# Altium PCB DAQ_v1.PcbDoc (part 2 of 2)
Units mil, origin at the board's own origin, x right, y up, seen from the top; angles counter-clockwise.
Board outline 4750 x 5000 mil, 4 copper layers (Component Side, Ground, Power, Solder Side), stack 61.2 mil thick; 174 components, 158 nets, 771 pads, 270 vias.
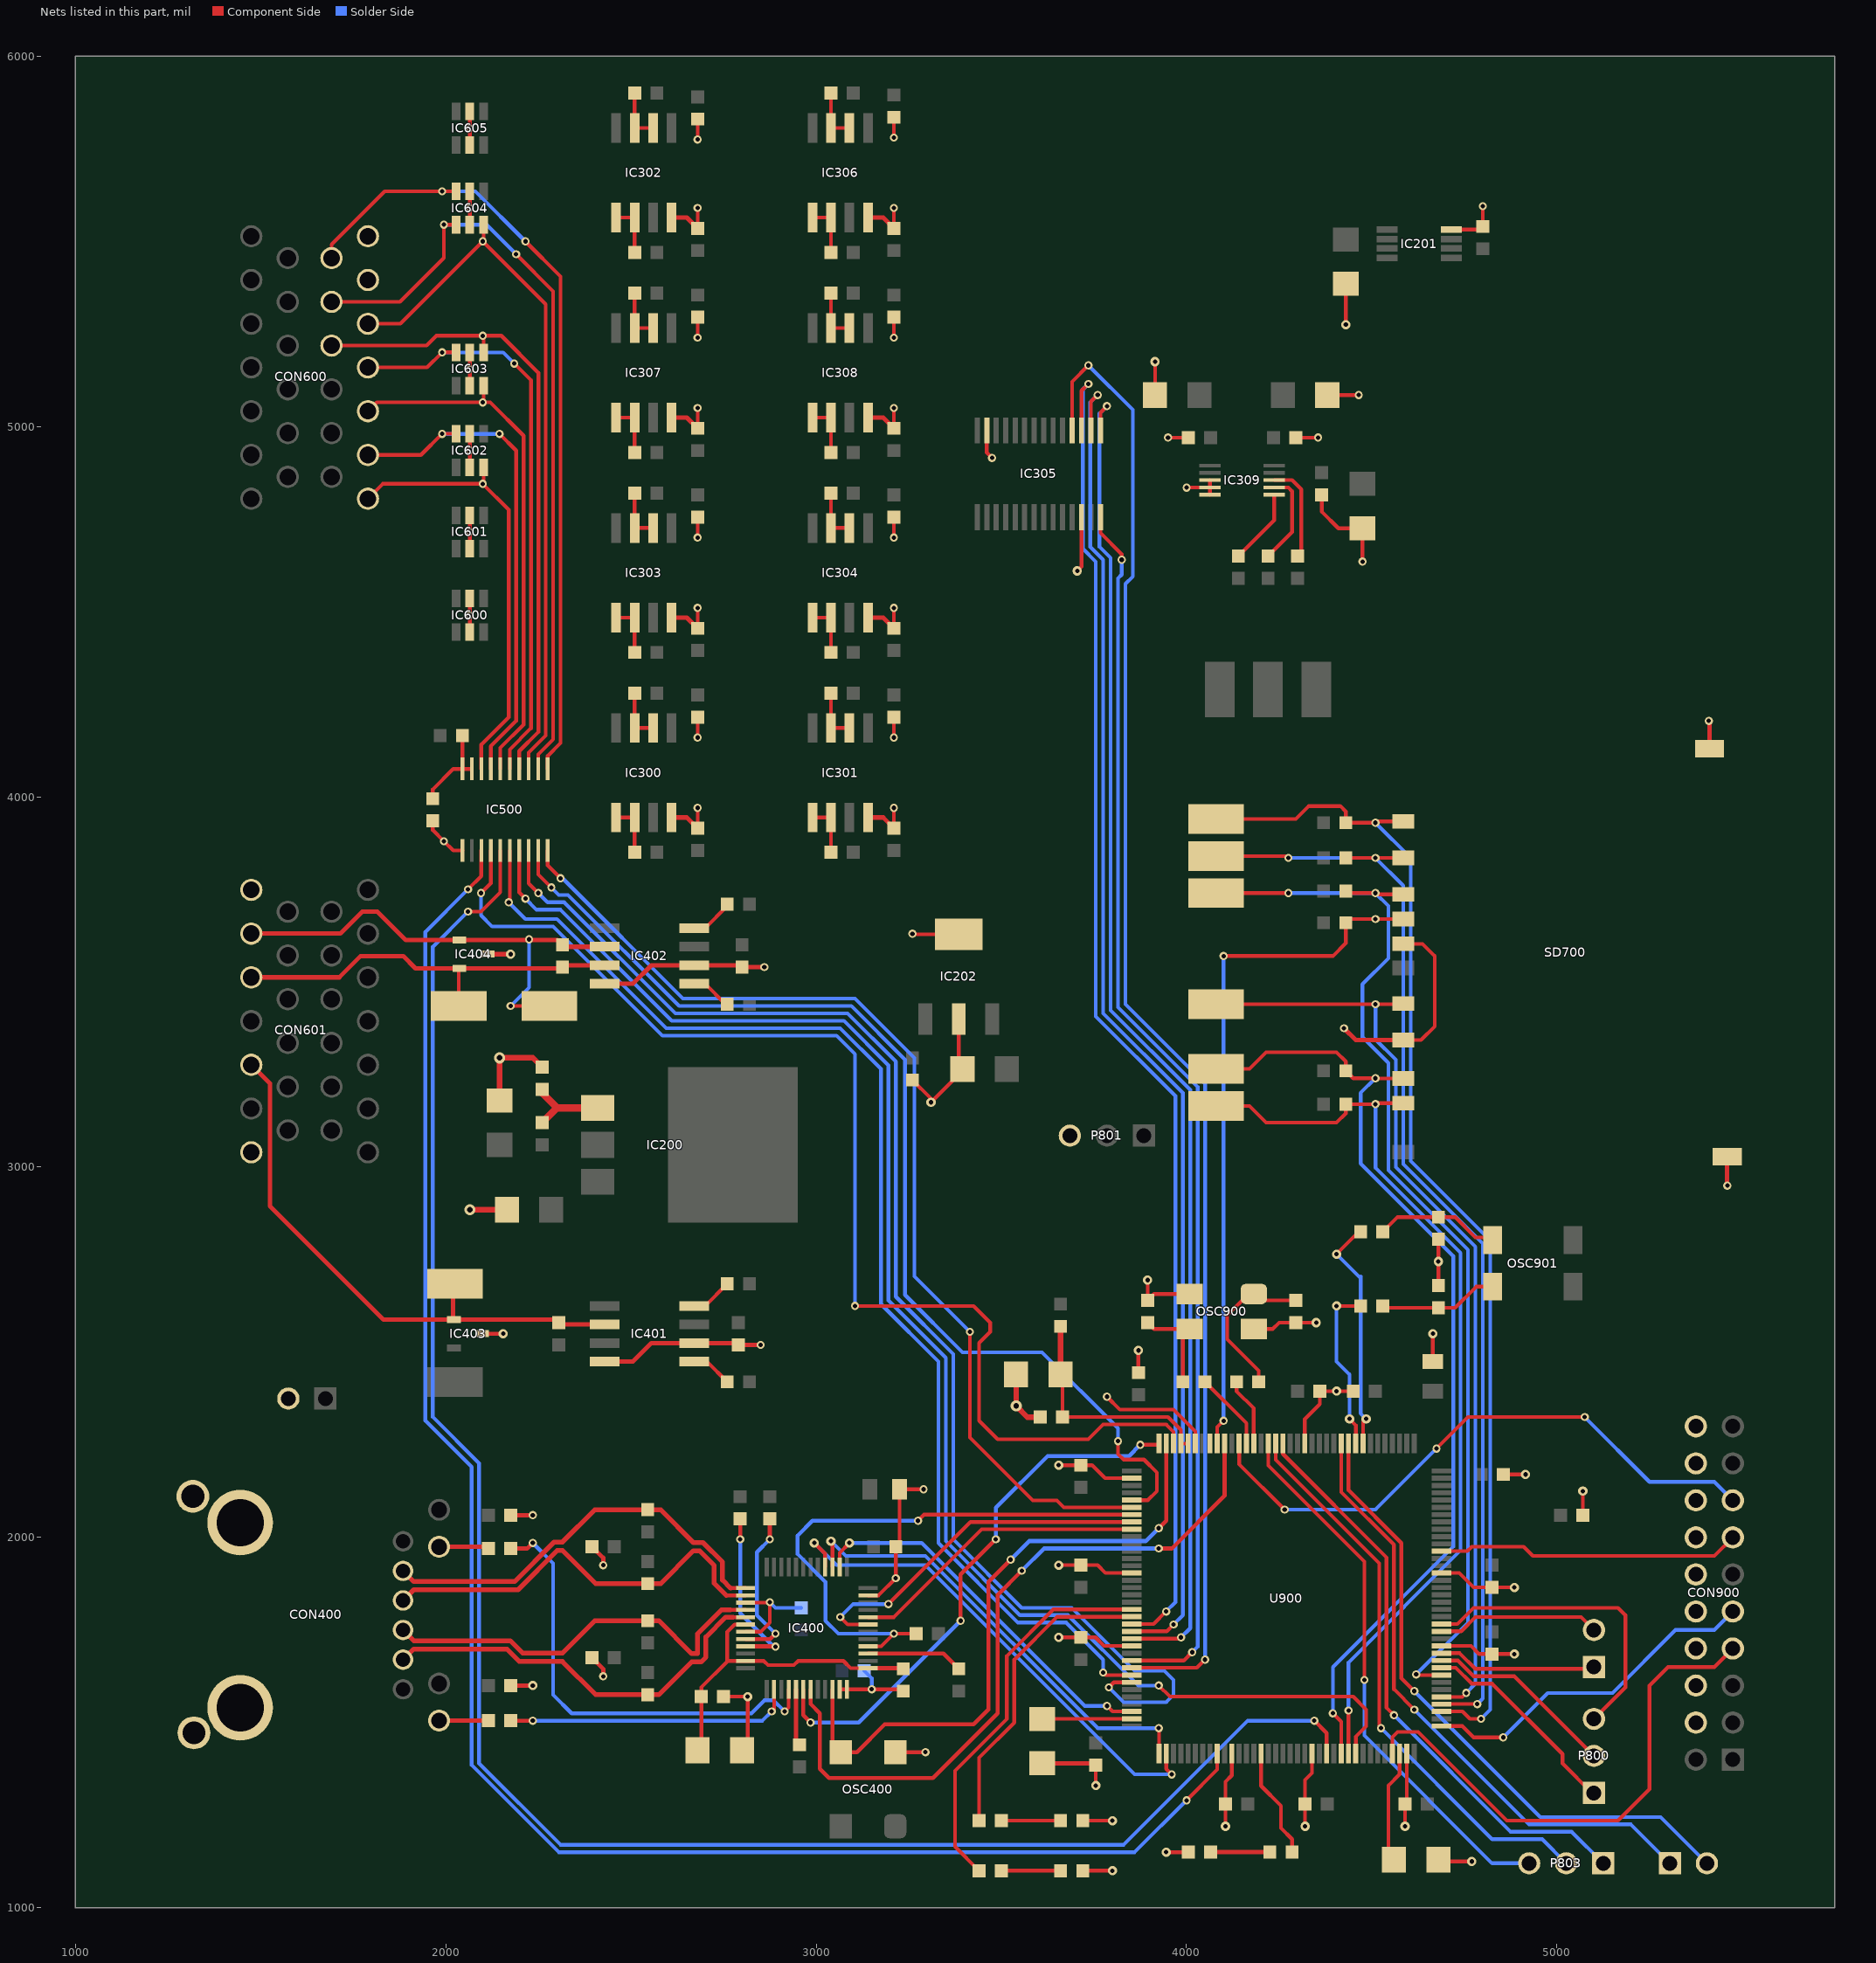
[diagram p4: the nets of this part, all layers, seen from the top]

## Via types
v1: diameter 22, hole 12, Component Side to Solder Side, 196 vias
v2: diameter 25, hole 12, Component Side to Solder Side, 50 vias
v3: diameter 30, hole 15, Component Side to Solder Side, 9 vias
v4: diameter 160, hole 134, Component Side to Solder Side, 4 vias
v5: diameter 40, hole 20, Component Side to Solder Side, 4 vias
v6: diameter 250, hole 145, Component Side to Solder Side, 3 vias
v7: diameter 68.9, hole 59.06, Component Side to Solder Side, 2 vias
v8: diameter 25, hole 15, Component Side to Solder Side, 1 vias
v9: diameter 50, hole 30, Component Side to Solder Side, 1 vias

## Nets (pads, with @x,y where several pads share a name; then routed paths per layer and width w, separated by ;. In a path a pad name is that pad's centre, name@x,y a point inside that pad or via, vN(x,y) a via of type N, cw(c..) or ccw(c..) an arc to the next point about the centre after c; other vN are vias at no path point) (continued)
CANH1: CON601.5 IC402.7 IC404.2 R414.1 TP810.1 | length 1097.5
  Component Side w10: TP810.1@2035,3435 2035,3534.99 IC404.2@2036.81,3536.81
  Component Side w12: CON601.5@1475,3512.44 1712.44,3512.44 1770,3570 1885,3570 1918.19,3536.81 IC404.2@2036.81,3536.81 2311.81,3536.81 R414.1@2315,3540 2320,3545 IC402.7@2429,3545
CANL0: CON601.3 IC401.6 IC403.1 R413.2 TP811.1 | length 1519.5
  Component Side w12: CON601.3@1475,3276.22 1525,3226.22 1525,2895 1831.81,2588.19 IC403.1@2021.81,2588.19 ; TP811.1@2020,2685 2020,2590 IC403.1@2021.81,2588.19 ; R413.2@2291.81,2588.19 IC403.1@2021.81,2588.19 ; R413.2@2305,2580 2310,2575 IC401.6@2429,2575
CANL1: CON601.6 IC402.6 IC404.1 R414.2 TP809.1 | length 1323.7
  Component Side w10: v1(2175,3435) TP809.1@2280,3435
  Component Side w12: CON601.6@1475,3630.55 1715.55,3630.55 1775,3690 1815,3690 1891.81,3613.19 IC404.1@2036.81,3613.19 2301.81,3613.19 R414.2@2315,3600 2320,3595 IC402.6@2429,3595
  Solder Side w10: v1(2175,3435) 2225,3485 v1(2225,3615)
CRS_DV: IC400.40 R403.1 U900.43 | length 1529.4
  Component Side w10: IC400.40@3140.35,1705.79 3175.79,1705.79 v1(3210,1740) R403.1@3270,1740 ; v1(3275,2045) 3291.38,2061.38 U900.43@3851.69,2061.38
  Solder Side w10: v1(3210,1740) 3060,1740 3025,1775 3025,1880 2950,1955 2950,2005 2990,2045 v1(3275,2045)
D0: IC500.7 U900.100 | length 4105.6
  Component Side w10: IC500.7@2198.39,3854.76 2198.39,3741.61 v1(2215,3725) ; v1(3925,1600) 3955,1570 4450,1570 4485,1535 4485,1490 4457.01,1462.01 U900.100@4457.01,1416.69
  Solder Side w10: v1(2215,3725) 2245,3695 2310,3695 2610,3395 3075,3395 3195,3275 3195,2640 3350,2485 3350,1990 3550,1790 3680,1790 3870,1600 v1(3925,1600)
D1: IC500.9 U900.41 | length 2945.2
  Component Side w10: IC500.9@2249.57,3854.76 2249.57,3790.43 v1(2285,3755) ; v1(3815,2260) 3815,2225 3830,2210 3885,2210 3920,2175 3920,2125 3895.75,2100.75 U900.41@3851.69,2100.75
  Solder Side w10: v1(2285,3755) 2305,3735 2330,3735 2630,3435 3095,3435 3240,3290 3240,2655 3395,2500 3610,2500 3815,2295 v1(3815,2260)
D2: IC500.10 U900.42 | length 2847.2
  Component Side w10: IC500.10@2275.16,3854.76 2275.16,3814.84 v1(2310,3780) ; v1(3415,2555) 3415,2270 3585,2100 3650,2100 3668.94,2081.06 U900.42@3851.69,2081.06
  Solder Side w10: v1(2310,3780) 2315,3780 2640,3455 3105,3455 3265,3295 3265,2705 v1(3415,2555)
D3: IC500.3 U900.81 | length 4830.5
  Component Side w10: v1(2060,3750) 2096.02,3786.02 IC500.3@2096.02,3854.76 ; v1(4000,1290) 4082.99,1372.99 U900.81@4082.99,1416.69
  Solder Side w10: v1(2060,3750) 1945,3635 1945,2315 2070,2190 2070,1385 2305,1150 3860,1150 v1(4000,1290)
D4: IC500.4 U900.34 | length 3294.4
  Component Side w10: v1(2095,3740) 2121.61,3766.61 IC500.4@2121.61,3854.76 ; v1(3105,2625) 3425,2625 3470,2580 3470,2555 3440,2525 3440,2315 3490,2265 3735,2265 3775,2305 3945,2305 3964.88,2285.12 U900.34@3964.88,2253.31
  Solder Side w10: v1(2095,3740) 2095,3680 2125,3650 2290,3650 2585,3355 3055,3355 3105,3305 v1(3105,2625)
D5: IC500.5 U900.96 | length 5199.5
  Component Side w10: v1(2060,3690) 2095,3690 2147.2,3742.2 IC500.5@2147.2,3854.76 ; v1(4345,1505) 4378.27,1471.73 U900.96@4378.27,1416.69
  Solder Side w10: v1(2060,3690) 1965,3595 1965,2325 2090,2200 2090,1390 2310,1170 3830,1170 4165,1505 v1(4345,1505)
D6: IC500.6 U900.65 | length 3366.5
  Component Side w10: v1(2170,3715) 2172.8,3717.8 IC500.6@2172.8,3854.76 ; v1(3775,1635) 3781.69,1628.31 U900.65@3851.69,1628.31
  Solder Side w10: v1(2170,3715) 2215,3670 2300,3670 2595,3375 3065,3375 3175,3265 3175,2630 3330,2475 3330,1985 3545,1770 3675,1770 3775,1670 v1(3775,1635)
D7: IC500.8 U900.66 | length 3692.8
  Component Side w10: IC500.8@2223.98,3854.76 2223.98,3766.02 v1(2250,3740) ; v1(3790,1595) 3803.62,1608.62 U900.66@3851.69,1608.62
  Solder Side w10: v1(2250,3740) 2275,3715 2320,3715 2620,3415 3085,3415 3215,3285 3215,2650 3370,2495 3370,1995 3555,1810 3690,1810 3860,1640 3940,1640 3965,1615 3965,1575 3945,1555 3830,1555 v1(3790,1595)
DAT0: R703.1 SD700.7 TP802.1 U900.98 | length 2684.9
  Component Side w10: TP802.1@4050,3265 4170,3265 4215,3310 4405,3310 4430,3285 R703.1@4430,3260 4450,3240 v1(4510,3240) 4510.51,3239.49 SD700.7@4585,3239.49 ; v1(4395,1525) 4417.64,1502.36 U900.98@4417.64,1416.69
  Solder Side w10: v1(4395,1525) 4395,1650 4720,1975 4720,2760 4470,3010 4470,3200 v1(4510,3240)
DAT1: R702.2 SD700.8 TP803.1 U900.99 | length 2564
  Component Side w10: TP803.1@4050,3165 4170,3165 4215,3120 4405,3120 4430,3145 R702.2@4430,3170 v1(4510,3170) 4512.56,3172.56 SD700.8@4585,3172.56 ; U900.99@4437.32,1416.69 v1(4437.32,1532.32)
  Solder Side w10: v1(4437.32,1532.32) 4437.32,1662.32 4740,1965 4740,2768.28 4510,2998.28 v1(4510,3170)
DAT2: R701.2 SD700.9 TP804.1 U900.111 | length 3260.9
  Component Side w10: TP804.1@4050,3940 4295,3940 4330,3975 4415,3975 4430,3960 R701.2@4430,3930 v1(4510,3930) 4513.58,3933.58 SD700.9@4585,3933.58 ; U900.111@4688.31,1529.88 4745.12,1529.88 4765,1510 v1(4795,1510)
  Solder Side w10: v1(4510,3930) 4605,3835 4605,3016.42 4820,2801.42 4820,1535 v1(4795,1510)
DAT3: R705.1 SD700.1 TP805.1 U900.112 | length 3125.3
  Component Side w10: TP805.1@4050,3840 4270,3840 v1(4275,3835) ; R705.1@4430,3835 v1(4510,3835) 4510.16,3835.16 SD700.1@4585,3835.16 ; U900.112@4688.31,1549.57 4688.74,1550 v1(4785,1550)
  Solder Side w10: v1(4275,3835) v1(4510,3835) 4585,3760 4585,3008.14 4800,2793.14 4800,1565 v1(4785,1550)
DIN0: CON600.17 IC500.14 IC603.6 | length 1747.8
  Component Side w10: CON600.17@1691.54,5218.39 1948.39,5218.39 1975,5245 v1(2100,5245) ; IC603.6@2102.4,5200.28 2102.4,5242.6 v1(2100,5245) ; IC500.14@2198.39,4075.24 2198.39,4123.39 2250,4175 2250,5145 2150,5245 v1(2100,5245)
DIN1: CON600.18 IC500.12 IC604.1 | length 2150.9
  Component Side w10: CON600.18@1691.54,5336.5 1876.5,5336.5 1995,5455 v1(1995,5545) IC604.1@2027.32,5545 ; v1(2190,5465) 2290,5365 2290,4155 2249.57,4114.57 IC500.12@2249.57,4075.24
  Solder Side w10: v1(1995,5545) 2110,5545 v1(2190,5465)
DIN2: CON600.19 IC500.11 IC604.4 | length 2192
  Component Side w10: CON600.19@1691.54,5454.61 1691.54,5491.54 1835,5635 v1(1990,5635) 1990.28,5635.28 IC604.4@2027.6,5635.28 ; v1(2215,5500) 2310,5405 2310,4145 2275.16,4110.16 IC500.11@2275.16,4075.24
  Solder Side w10: v1(1990,5635) 2080,5635 v1(2215,5500)
DIN3: CON600.20 IC500.18 IC602.3 | length 1201.7
  Component Side w10: CON600.20@1789.96,4805 1829.96,4845 v1(2100,4845) ; IC500.18@2096.02,4075.24 2096.02,4141.02 2170,4215 2170,4775 v1(2100,4845) ; IC602.3@2102.4,4889.72 2102.4,4847.4 v1(2100,4845)
DIN4: CON600.21 IC500.17 IC602.4 | length 1368
  Component Side w10: CON600.21@1789.96,4923.11 1933.11,4923.11 v1(1990,4980) 1990.28,4980.28 IC602.4@2027.6,4980.28 ; IC500.17@2121.61,4075.24 2121.61,4136.61 2190,4205 2190,4935 v1(2145,4980)
  Solder Side w10: v1(1990,4980) v1(2145,4980)
DIN5: CON600.22 IC500.16 IC603.3 | length 1438.7
  Component Side w10: CON600.22@1789.96,5041.22 1813.74,5065 v1(2100,5065) ; IC603.3@2102.4,5109.72 2102.4,5067.4 v1(2100,5065) ; IC500.16@2147.2,4075.24 2147.2,4132.2 2210,4195 2210,4975 2120,5065 v1(2100,5065)
DIN6: CON600.23 IC500.15 IC603.4 | length 1599.1
  Component Side w10: CON600.23@1789.96,5159.33 1949.33,5159.33 v1(1990,5200) 1990.28,5200.28 IC603.4@2027.6,5200.28 ; IC500.15@2172.8,4075.24 2172.8,4127.8 2230,4185 2230,5125 v1(2185,5170)
  Solder Side w10: v1(1990,5200) 2155,5200 v1(2185,5170)
DIN7: CON600.24 IC500.13 IC604.3 | length 1962.2
  Component Side w10: CON600.24@1789.96,5277.44 1877.44,5277.44 v1(2100,5500) ; IC604.3@2102.4,5544.72 2102.4,5502.4 v1(2100,5500) ; IC500.13@2223.98,4075.24 2223.98,4118.98 2270,4165 2270,5330 v1(2100,5500)
GND: C200.2 C201.2 C202.2 C203.1 C204.1 C205.1 C300.2 C301.2 C302.2 C303.2 C304.2 C305.1 C306.1 C307.1 C308.1 C309.1 C310.2 C311.2 C312.2 C313.2 C314.2 C315.1 C316.1 C317.2 C318.1 C319.1 C320.1 C321.1 C401.1 C402.1 C403.2 C404.1 C405.1 C406.1 C407.1 C408.1 C409.2 C410.1 C411.1 C412.2 C413.2 C500.2 C900.1 C901.1 C902.1 C903.1 C906.2 C907.2 C908.2 C909.1 C910.1 C911.1 C912.1 C913.1 C914.1 C915.1 C916.1 C917.1 C918.1 C919.1 C920.1 C921.2 C922.1 C923.1 CON400.S CON600.25 CON600.26 CON601.1 CON601.7 CON900.4 CON900.6 CON900.8 CON900.10 CON900.12 CON900.14 CON900.16 CON900.18 CON900.20 IC201.4 IC202.2 IC300.4 IC301.4 IC302.4 IC303.4 IC304.4 IC305.12 IC305.27 IC306.4 IC307.4 IC308.4 IC309.3 IC309.4 IC309.5 IC400.15 IC400.19 IC400.35 IC400.36 IC400.47 IC401.2 IC401.8 IC402.2 IC402.8 IC403.3 IC404.3 IC500.1 IC600.2 IC600.5 IC601.2 IC601.5 IC602.2 IC602.5 IC603.2 IC603.5 IC604.2 IC604.5 IC605.2 IC605.5 LED_B.2 LED_G.2 LED_R.2 OSC400.2 OSC900.2 OSC900.4 P801.3 P802.2 R201.2 R904.1 SD700.3 SD700.6 SD700.GND U900.16 U900.31 U900.38 U900.51 U900.61 U900.83 U900.94 U900.107 U900.120 U900.130 | length 10969.2
  Component Side w10: C500.2@1965,3935 1965,3910 v1(1995,3880) 2020.24,3854.76 IC500.1@2044.84,3854.76 ; IC600.2@2065,4444.72 v1(2065,4490) IC600.5@2065,4535.28 ; IC601.2@2065,4669.72 v1(2065,4715) IC601.5@2065,4760.28 ; IC602.2@2065,4889.72 v1(2065,4935) IC602.5@2065,4980.28 ; IC603.2@2065,5109.72 v1(2065,5155) IC603.5@2065,5200.28 ; IC604.2@2065,5544.72 v1(2065,5590) IC604.5@2065,5635.28 ; IC605.2@2065,5759.72 v1(2065,5805) IC605.5@2065,5850.28 ; IC403.3@2098.19,2550 v2(2155,2550) ; C300.2@2680,3915 v1(2680,3970) ; v1(2680,4160) C305.1@2680,4215 ; C303.2@2680,4455 v1(2680,4510) ; v1(2680,4700) C308.1@2680,4755 ; C311.2@2680,4995 v1(2680,5050) ; v1(2680,5240) C320.1@2680,5295 ; C302.2@2680,5535 v1(2680,5590) ; v1(2680,5775) C307.1@2680,5830 ; C402.1@2750,1570 v2(2815,1570) 2815,1440 C403.2@2800,1425 ; C412.2@2785,2525 C412.2@2790,2520 ; C413.2@2795,3545 C413.2@2800,3540 ; IC400.19@2809.65,1745.16 2850.16,1745.16 2875,1770 2875,1822.8 2873.9,1823.9 IC400.15@2809.65,1823.9 ; IC400.35@3063.58,1589.65 IC400.36@3083.27,1589.65 3149.65,1589.65 v1(3150,1590) C401.1@3235,1590 ; IC400.47@3140.35,1843.58 3168.58,1843.58 v1(3215,1890) C404.1@3215,1975 3225,1985 C407.1@3225,2130 v1(3290,2130) ; C301.2@3210,3915 v1(3210,3970) ; v1(3210,4160) C306.1@3210,4215 ; C304.2@3210,4455 v1(3210,4510) ; v1(3210,4700) C309.1@3210,4755 ; C312.2@3210,4995 v1(3210,5050) ; v1(3210,5240) C321.1@3210,5295 ; C310.2@3210,5535 v1(3210,5590) ; v1(3210,5780) C319.1@3210,5835 ; OSC400.2@3213.5,1420 v1(3295,1420) ; C203.1@3260,3235 3310,3185 v2(3310,3175) 3395,3260 3385,3270 IC202.2@3385,3400 ; v1@3261.65,3628.35 IC202.2@3385,3628.35 ; IC305.27@3460.59,4988.86 3460.59,4929.41 v1(3475,4915) ; v2(3655,1730) C909.1@3715,1730 3754.09,1730 3777.05,1707.05 U900.61@3851.69,1707.05 ; v2(3655,1925) C910.1@3715,1925 3760,1925 3781.1,1903.9 U900.51@3851.69,1903.9 ; v2(3655,2195) C911.1@3715,2195 3745,2195 3780.2,2159.8 U900.38@3851.69,2159.8 ; v2(3705,4610) 3716.5,4621.5 IC305.12@3716.5,4755 ; LED_R.2@3720,1100 v2(3800,1100) ; LED_G.2@3720,1235 v2(3800,1235) ; v2(3755,1330) C908.2@3755,1385 ; v1(3785,2380) 3820,2345 3965,2345 4023.94,2286.06 U900.31@4023.94,2253.31 ; C912.1@3870,2445 v2(3870,2505) ; v2(3895,2695) C901.1@3895,2640 3912.24,2657.24 OSC900.2@4008.39,2657.24 ; C313.2@3915,5085 v2(3915,5175) ; v2(3945,1150) LED_B.2@4005,1150 ; v1(3950,4970) C315.1@4005,4970 ; v1(4000,4835) 4000.32,4835.31 IC309.4@4063.39,4835.31 ; IC309.5@4063.39,4815.63 IC309.4@4063.39,4835.31 ; IC309.3@4063.39,4855 IC309.4@4063.39,4835.31 ; v2(4105,1220) C920.1@4105,1280 4105,1340 4122.36,1357.36 U900.83@4122.36,1416.69 ; OSC900.4@4181.61,2562.76 4232.76,2562.76 4250,2580 C900.1@4295,2580 v2(4350,2580) ; C316.1@4295,4970 v1(4355,4970) ; U900.16@4319.21,2253.31 4319.21,2319.21 4360,2360 C913.1@4360,2395 v2(4405,2395) C914.1@4450,2395 ; v2(4320,1220) C919.1@4320,1280 4320,1345 4338.9,1363.9 U900.94@4338.9,1416.69 ; C318.1@4365,4815 4365,4770 4410,4725 C317.2@4475,4725 v1(4475,4635) ; C314.2@4380,5085 v1(4465,5085) ; v2(4430,5275) C205.1@4430,5385 ; SD700.6@4585,3343.03 4633.03,3343.03 4670,3380 4670,3570 4637.13,3602.87 SD700.3@4585,3602.87 ; v2(4590,1220) C918.1@4590,1280 4594.8,1284.8 U900.107@4594.8,1416.69 ; C921.2@4665,2475 v2(4665,2550) ; C922.1@4680,1125 v2(4770,1125) ; C903.1@4680,2680 v2(4680,2745) C902.1@4680,2805 ; U900.120@4688.31,1707.05 4767.95,1707.05 4790,1685 C917.1@4825,1685 v2(4885,1685) ; U900.130@4688.31,1903.9 4736.1,1903.9 4775,1865 C916.1@4825,1865 v2(4885,1865) ; IC201.4@4715,5531.77 4791.77,5531.77 C204.1@4800,5540 v1(4800,5595) ; C915.1@4855,2170 v2(4915,2170) ; R904.1@5070,2060 v2(5070,2125)
  Component Side w12: IC404.3@2113.19,3575 v2(2175,3575) ; C409.2@2175,1600 v2(2235,1600) ; C408.1@2175,2060 v1(2235,2060) ; C410.1@2395,1675 2425,1645 v1(2425,1625) ; C411.1@2395,1975 2425,1945 v1(2425,1925) ; IC401.8@2429,2475 2505,2475 2555,2525 IC401.2@2671,2525 C412.2@2785,2525 ; IC402.8@2429,3495 2505,3495 2555,3545 IC402.2@2671,3545 C413.2@2795,3545 ; IC300.4@2610,3944 2651,3944 C300.2@2680,3915 ; IC303.4@2610,4484 2651,4484 C303.2@2680,4455 ; IC307.4@2610,5024 2651,5024 C311.2@2680,4995 ; IC302.4@2610,5564 2651,5564 C302.2@2680,5535 ; C412.2@2790,2520 v1(2850,2520) ; C413.2@2800,3540 v1(2860,3540) ; IC301.4@3140,3944 3181,3944 C301.2@3210,3915 ; IC304.4@3140,4484 3181,4484 C304.2@3210,4455 ; IC308.4@3140,5024 3181,5024 C312.2@3210,4995 ; IC306.4@3140,5564 3181,5564 C310.2@3210,5535 ; v1(3260,3630) v1@3261.65,3628.35 ; C923.1@3610,1390 3750,1390 C908.2@3755,1385 ; v1(4425,3375) 4456.97,3343.03 SD700.6@4585,3343.03 ; v1(5410,4205) 5412.17,4202.83 SD700.GND@5412.17,4130.43 ; SD700.GND@5459.41,3028.07 5459.41,2950.59 v1(5460,2950)
  Component Side w15: v3(2065,2885) C201.2@2165,2885 ; C200.2@2145,3180 v3(2145,3295) 2235,3295 R201.2@2260,3270 ; C906.2@3540,2440 v3(3540,2355) 3570,2325 C907.2@3605,2325
  Solder Side w10: v1(2875,1825) 2890,1810 C406.1@2960,1810 ; C405.1@3130,1640 3150,1620 v1(3150,1590)
I2C2_SCL: P805.1 U900.11 | length 1662
  Component Side w10: U900.11@4417.64,2253.31 4417.64,2122.36 4560,1980 4560,1590 v1(4615,1535)
  Solder Side w10: v1(4615,1535) 4925,1225 5200,1225 P805.1@5305,1120
I2C2_SDA: P805.2 U900.10 | length 1724.5
  Component Side w10: U900.10@4437.32,2253.31 4437.32,2127.68 4580,1985 4580,1620 v1(4615,1585)
  Solder Side w10: v1(4615,1585) 4955,1245 5280,1245 P805.2@5405,1120
LED_ACTL: IC400.26 R401.2 | length 777.7
  Component Side w10: v1(2880,1530) 2886.42,1536.42 IC400.26@2886.42,1589.65
  Component Side w11: R401.2@2175,1505 v1(2235,1505)
  Solder Side w10: v1(2235,1505) 2855,1505 v1(2880,1530)
LED_B: R801.2 U900.87 | length 301.4
  Component Side w10: U900.87@4201.1,1416.69 4201.1,1328.9 4255,1275 4255,1215 4285,1185 R801.2@4285,1150
LED_G: R800.2 U900.57 | length 839
  Component Side w10: R800.2@3440,1235 3440,1405 3535,1500 3535,1670 3650.79,1785.79 U900.57@3851.69,1785.79
LED_L: IC400.28 R406.2 | length 1235.7
  Component Side w10: v1(2915,1530) 2925.79,1540.79 IC400.28@2925.79,1589.65
  Component Side w11: R406.2@2175,1970 2220,1970 v1(2235,1985)
  Solder Side w10: v1(2235,1985) 2290,1930 2290,1575 2340,1525 2825,1525 2860,1560 2885,1560 v1(2915,1530)
LED_R: R802.2 U900.56 | length 1054.2
  Component Side w10: R802.2@3440,1100 3375,1165 3375,1370 3515,1510 3515,1680 3640.47,1805.47 U900.56@3851.69,1805.47 U900.56@3851.22,1805
MDC: IC400.31 U900.27 | length 1972.1
  Component Side w11: IC400.31@2984.84,1589.65 2984.84,1550.16 3010,1525 3010,1375 3035,1350 3315,1350 3490,1525 3490,1845 v1(3555,1910) ; v1(3925,1970) 3960,1970 4102.68,2112.68 U900.27@4102.68,2253.31
  Solder Side w11: v1(3555,1910) 3615,1970 v1(3925,1970)
MDIO: IC400.30 U900.36 | length 1473.4
  Component Side w11: IC400.30@2965.16,1589.65 2965.16,1519.84 v1(2985,1500) ; v1(3390,1775) 3390,1900 v1(3485,1995) ; v1(3875,2250) 3922.21,2250 U900.36@3925.51,2253.31
  Solder Side w11: v1(2985,1500) 3115,1500 v1(3390,1775) ; v1(3485,1995) 3485,2080 3625,2220 3845,2220 v1(3875,2250)
MUX0: IC305.17 U900.58 | length 3674.2
  Component Side w10: IC305.17@3716.5,4988.86 3716.5,5096.5 3730,5110 v1@3735,5110 ; U900.58@3851.69,1766.1 3911.1,1766.1 v1(3945,1800)
  Solder Side w10: v1(3735,5115) 3720,5100 3720,4670 3755,4635 3755,3406.86 3970,3191.86 3970,1825 v1(3945,1800)
MUX1: IC305.16 U900.59 | length 3666.8
  Component Side w10: IC305.16@3742.09,4988.86 3742.09,5067.09 v1(3760,5085) ; U900.59@3851.69,1746.42 3946.42,1746.42 v1(3965,1765)
  Solder Side w10: v1(3760,5085) 3740,5065 3740,4675 3775,4640 3775,3415.15 3990,3200.15 3990,1790 v1(3965,1765)
MUX2: IC305.15 U900.60 | length 3653.1
  Component Side w10: IC305.15@3767.68,4988.86 3767.68,5037.68 v1(3785,5055) ; U900.60@3851.69,1726.73 3981.73,1726.73 v1(3985,1730)
  Solder Side w10: v1(3785,5055) 3765,5035 3765,4675 3795,4645 3795,3423.43 4010,3208.43 4010,1755 v1(3985,1730)
MUX3: IC305.14 U900.63 | length 3360.7
  Component Side w10: IC305.14@3767.68,4755 3767.68,4712.32 3825,4655 v1(3825,4640) ; U900.63@3851.69,1667.68 3992.68,1667.68 v1(4015,1690)
  Solder Side w10: v1(3825,4640) 3825,4600 3815,4590 3815,3431.72 4030,3216.72 4030,1705 v1(4015,1690)
MUXEN: IC305.18 U900.64 | length 4043.9
  Component Side w10: IC305.18@3690.91,4988.86 3690.91,5120.91 v1(3735,5165) ; U900.64@3851.69,1647.99 4027.99,1647.99 v1(4050,1670)
  Solder Side w10: v1(3735,5165) 3855,5045 3855,4595 3835,4575 3835,3440 4050,3225 v1(4050,1670)
NetC500_1: C500.1 IC500.19 IC500.20 R500.1 | length 243.1
  Component Side w10: C500.1@1965,3995 1965,4020 2020.24,4075.24 IC500.20@2044.84,4075.24 ; R500.1@2045,4165 2044.84,4164.84 IC500.20@2044.84,4075.24 ; IC500.19@2070.43,4075.24 IC500.20@2044.84,4075.24
NetC900_2: C900.2 OSC900.1 R900.1 | length 431.1
  Component Side w10: R900.1@4195,2420 4195,2450 4110,2535 4110,2600 4167.24,2657.24 OSC900.1@4181.61,2657.24 4198.86,2640 C900.2@4295,2640
NetC901_2: C901.2 OSC900.3 R901.1 | length 270.9
  Component Side w10: C901.2@3895,2580 3912.24,2562.76 OSC900.3@4008.39,2562.76 3990,2544.37 R901.1@3990,2420
NetC902_2: C902.2 OSC901.4 R902.1 | length 339
  Component Side w10: R902.1@4530,2825 4570,2865 C902.2@4680,2865 4725,2865 4780,2810 4819.72,2810 OSC901.4@4826.73,2802.99
NetC903_2: C903.2 OSC901.1 R903.1 | length 322.4
  Component Side w10: R903.1@4530,2625 4535,2620 C903.2@4680,2620 4725,2620 4782.01,2677.01 OSC901.1@4826.73,2677.01
NetC906_1: C906.1 C907.1 L900.2 U900.32 U900.33 | length 648.1
  Component Side w10: C906.1@3645,2440 3665,2420 C907.1@3665,2325 ; C907.1@3665,2315 3675,2325 3950,2325 3984.57,2290.43 U900.33@3984.57,2253.31 U900.32@4004.25,2253.31
  Component Side w15: C906.1@3660,2440 L900.2@3660,2570
NetC922_2: C922.2 U900.106 | length 300.4
  Component Side w10: C922.2@4545,1140 C922.2@4560,1125 ; C922.2@4545,1150 4545,1330 4575.12,1360.12 U900.106@4575.12,1416.69
NetC923_2: C923.2 U900.71 | length 248.1
  Component Side w10: C923.2@3609.8,1495.2 3624.8,1510.2 U900.71@3851.69,1510.2
NetCON400_7: CON400.7 R401.1 | length 132.6
  Component Side w12: CON400.7@1982.01,1505.35 R401.1@2114.65,1505.35
NetCON400_9: CON400.9 R406.1 | length 134.9
  Component Side w12: CON400.9@1982.01,1974.65 2110.35,1974.65 R406.1@2115,1970
NetIC200_GND: IC200.1 R200.2 R201.1 | length 233.1
  Component Side w20: R200.2@2260,3120 2300,3160 ; R201.1@2260,3210 2260,3200 2300,3160 ; IC200.1@2410,3160 2300,3160
NetIC300_1: IC300.1 IC300.2 R300.1 | length 144
  Component Side w10: IC300.1@2460,3944 IC300.2@2510,3944 R300.1@2510,3850
NetIC300_6: IC300.6 IC300.7 R305.2 | length 144
  Component Side w10: R305.2@2510,4280 IC300.7@2510,4186 IC300.6@2560,4186
NetIC301_1: IC301.1 IC301.2 R301.1 | length 144
  Component Side w10: IC301.1@2990,3944 IC301.2@3040,3944 R301.1@3040,3850
NetIC301_6: IC301.6 IC301.7 R306.2 | length 144
  Component Side w10: R306.2@3040,4280 IC301.7@3040,4186 IC301.6@3090,4186
NetIC302_1: IC302.1 IC302.2 R302.1 | length 144
  Component Side w10: IC302.1@2460,5564 IC302.2@2510,5564 R302.1@2510,5470
NetIC302_6: IC302.6 IC302.7 R307.2 | length 144
  Component Side w10: R307.2@2510,5900 IC302.7@2510,5806 IC302.6@2560,5806
NetIC303_1: IC303.1 IC303.2 R303.1 | length 144
  Component Side w10: IC303.1@2460,4484 IC303.2@2510,4484 R303.1@2510,4390
NetIC303_6: IC303.6 IC303.7 R308.2 | length 144
  Component Side w10: R308.2@2510,4820 IC303.7@2510,4726 IC303.6@2560,4726
NetIC304_1: IC304.1 IC304.2 R304.1 | length 144
  Component Side w10: IC304.1@2990,4484 IC304.2@3040,4484 R304.1@3040,4390
NetIC304_6: IC304.6 IC304.7 R309.2 | length 144
  Component Side w10: R309.2@3040,4820 IC304.7@3040,4726 IC304.6@3090,4726
NetIC306_1: IC306.1 IC306.2 R310.1 | length 144
  Component Side w10: IC306.1@2990,5564 IC306.2@3040,5564 R310.1@3040,5470
NetIC306_6: IC306.6 IC306.7 R313.2 | length 144
  Component Side w10: R313.2@3040,5900 IC306.7@3040,5806 IC306.6@3090,5806
NetIC307_1: IC307.1 IC307.2 R311.1 | length 144
  Component Side w10: IC307.1@2460,5024 IC307.2@2510,5024 R311.1@2510,4930
NetIC307_6: IC307.6 IC307.7 R314.2 | length 144
  Component Side w10: R314.2@2510,5360 IC307.7@2510,5266 IC307.6@2560,5266
NetIC308_1: IC308.1 IC308.2 R312.1 | length 144
  Component Side w10: IC308.1@2990,5024 IC308.2@3040,5024 R312.1@3040,4930
NetIC308_6: IC308.6 IC308.7 R315.2 | length 144
  Component Side w10: R315.2@3040,5360 IC308.7@3040,5266 IC308.6@3090,5266
NetIC309_6: IC309.6 R316.1 | length 205.6
  Component Side w10: R316.1@4140,4650 4236.61,4746.61 IC309.6@4236.61,4815.63
NetIC309_7: IC309.7 R317.1 | length 254.6
  Component Side w10: R317.1@4220,4650 4285,4715 4285,4825 4274.69,4835.31 IC309.7@4236.61,4835.31
NetIC309_8: IC309.8 R318.1 | length 267.9
  Component Side w10: IC309.8@4236.61,4855 4285,4855 4310,4830 4310,4660 R318.1@4300,4650
NetIC400_20: IC400.20 R405.2 | length 431.6
  Component Side w10: IC400.20@2809.65,1725.47 2875.47,1725.47 v1(2890,1740)
  Component Side w11: v1(2875,1995) R405.2@2875,2050
  Solder Side w10: v1(2875,1995) 2840,1960 2840,1790 v1(2890,1740)
NetIC400_21: IC400.21 R404.2 | length 468
  Component Side w11: v1(2795,1995) R404.2@2795,2050 ; IC400.21@2809.65,1705.79 2889.21,1705.79 v1(2890,1705)
  Solder Side w11: v1(2795,1995) 2795,1795 2885,1705 v1(2890,1705)
NetIC400_29: IC400.29 R400.1 | length 153.6
  Component Side w11: IC400.29@2945.47,1589.65 2945.47,1449.53 R400.1@2955,1440
NetIC400_39: IC400.39 R402.1 | length 261.7
  Component Side w11: IC400.39@3140.35,1686.1 3343.9,1686.1 R402.1@3385,1645
NetIC401_1: IC401.1 R411.1 | length 111.8
  Component Side w10: IC401.1@2671,2475 2705,2475 R411.1@2760,2420
NetIC401_4: IC401.4 R415.1 | length 113.9
  Component Side w10: IC401.4@2671,2625 2700,2625 R415.1@2760,2685
NetIC402_1: IC402.1 R412.1 | length 111.8
  Component Side w10: IC402.1@2671,3495 2700,3495 2755,3440 R412.1@2760,3440
NetIC402_4: IC402.4 R416.1 | length 118.9
  Component Side w10: IC402.4@2671,3645 2700,3645 2760,3705 R416.1@2760,3710
NetLED_B_1: LED_B.1 R801.1 | length 160
  Component Side w12: LED_B.1@4065,1150 R801.1@4225,1150
NetLED_G_1: LED_G.1 R800.1 | length 160
  Component Side w10: R800.1@3500,1235 LED_G.1@3660,1235
NetLED_R_1: LED_R.1 R802.1 | length 160
  Component Side w10: R802.1@3500,1100 LED_R.1@3660,1100
NRST: CON900.15 U900.25 | length 1636
  Component Side w10: U900.25@4142.05,2253.31 4142.05,2197.95 v1(4265,2075) ; v1(4675,2240) 4760,2325 v1(5075,2325)
  Solder Side w10: v1(4265,2075) 4510,2075 v1(4675,2240) ; v1(5075,2325) 5250,2150 5425,2150 CON900.15@5475,2100
OSCIN: IC400.34 OSC400.3 U900.35 | length 1718.6
  Component Side w11: IC400.34@3043.9,1589.65 3043.9,1422.6 OSC400.3@3046.5,1420 ; OSC400.3@3066.5,1420 3110,1420 3185,1495 3425,1495 3465,1535 3465,1880 v1(3525,1940) ; v1(3925,2025) 3945,2045 3945,2253.11 U900.35@3945.2,2253.31
  Solder Side w11: v1(3525,1940) 3575,1990 3890,1990 v1(3925,2025)
PC14-OSC32_IN: R902.2 U900.8 | length 643.1
  Component Side w10: v2(4405,2765) 4465,2825 R902.2@4470,2825 ; U900.8@4476.69,2253.31 4476.69,2311.69 v2(4485,2320)
  Solder Side w10: v2(4405,2765) 4470,2700 ; 4470,2705 4470,2335 v2(4485,2320)
PC15-OSC32_OUT: R903.2 U900.9 | length 458.2
  Component Side w10: v2(4405,2625) R903.2@4470,2625 ; v2(4440,2320) 4457.01,2302.99 U900.9@4457.01,2253.31
  Solder Side w10: v2(4405,2625) 4405,2475 4440,2440 v2(4440,2320)
PFB: C401.2 C402.2 C403.1 IC400.18 IC400.23 IC400.37 | length 905.7
  Component Side w10: C403.1@2680,1425 2690,1435 C402.2@2690,1570 2690,1595 2760,1665 ; IC400.18@2809.65,1764.84 2780.16,1764.84 2780,1765 2760,1745 2760,1665 ; IC400.37@3140.35,1646.73 3093.27,1646.73 3073.58,1666.42 2951.42,1666.42 2940,1655 2870,1655 2858.58,1666.42 IC400.23@2809.65,1666.42 2761.42,1666.42 2760,1665
  Component Side w12: IC400.37@3140.35,1646.73 3231.73,1646.73 C401.2@3235,1650
PH0-OSC_IN: R900.2 U900.23 | length 185.9
  Component Side w10: R900.2@4135,2420 4135,2395 4181.42,2348.58 U900.23@4181.42,2253.31
PH1-OSC_OUT: R901.2 U900.24 | length 213
  Component Side w10: R901.2@4050,2420 4161.73,2308.27 U900.24@4161.73,2253.31
RD_N: CON400.5 IC400.13 R410.1 | length 1133.1
  Component Side w11: 2768.93,1863.27 IC400.13@2809.65,1863.27
  Component Side w13: CON400.5@1884.76,1909.68 1913.62,1880.82 2185.82,1880.82 2292.2,1987.2 2315,1987.2 2402.8,2075 R410.1@2545,2075 2580,2075 2668.9,1986.1 2694.2,1986.1 2747.2,1933.1 2747.2,1885 2768.93,1863.27
RD_P: CON400.4 IC400.14 R408.2 | length 1133
  Component Side w11: 2757.22,1843.58 IC400.14@2809.65,1843.58
  Component Side w13: CON400.4@1884.76,1829.76 1913.62,1858.62 2195.02,1858.62 2301.4,1965 2315,1965 2405,1875 R408.2@2545,1875 2580,1875 2668.9,1963.9 2685,1963.9 2725,1923.9 2725,1875.8 2757.22,1843.58
RXD0: IC400.43 U900.44 | length 976.7
  Component Side w10: v1(3065,1785) 3085.16,1764.84 IC400.43@3140.35,1764.84 ; v1(3195,1820) 3416.69,2041.69 U900.44@3851.69,2041.69
  Solder Side w10: v1(3065,1785) 3100,1820 v1(3195,1820)
RXD1: IC400.44 U900.45 | length 809.7
  Component Side w10: IC400.44@3140.35,1784.53 3209.53,1784.53 3447.01,2022.01 U900.45@3851.69,2022.01
SD_CD: R700.2 SD700.10 U900.28 | length 1882.5
  Component Side w10: U900.28@4082.99,2253.31 4082.99,2297.99 v1(4100,2315) ; v1(4100,3570) 4395,3570 4430,3605 R700.2@4430,3660 4440,3670 v1(4510,3670) 4510.2,3669.8 SD700.10@4585,3669.8
  Solder Side w10: v1(4100,2315) v1(4100,3570)
SD_CLK: SD700.5 TP800.1 U900.113 | length 2588.9
  Component Side w10: TP800.1@4050,3440 v1(4510,3440) 4583.54,3440 SD700.5@4585,3441.46 ; U900.113@4688.31,1569.25 4744.25,1569.25 v1(4755,1580)
  Solder Side w10: v1(4510,3440) 4510,3345 4565,3290 4565,2999.85 4780,2784.85 4780,1605 v1(4755,1580)
SD_CMD: R704.1 SD700.2 TP801.1 U900.116 | length 3017
  Component Side w10: TP801.1@4050,3740 v1(4275,3740) ; R704.1@4430,3745 4435,3740 v1(4510,3740) 4513.27,3736.73 SD700.2@4585,3736.73 ; v1(4620,1630) 4621.69,1628.31 U900.116@4688.31,1628.31
  Solder Side w10: v1(4275,3740) v1(4510,3740) 4545,3705 4545,3563.75 4475,3493.75 4475,3351.25 4545,3281.25 4545,2991.57 4760,2776.57 4760,1770 v1(4620,1630)
SD_WP: U900.29
SPI5_MISO: P803.2 U900.20 | length 1537.3
  Component Side w10: U900.20@4240.47,2253.31 4240.47,2209.53 4520,1930 4520,1490 v1(4525,1485)
  Solder Side w10: v1(4525,1485) 4825,1185 4960,1185 P803.2@5025,1120
SPI5_MOSI: P803.3 U900.21 | length 1483.6
  Component Side w10: U900.21@4220.79,2253.31 4220.79,2194.21 4480,1935 v1(4480,1615)
  Solder Side w10: v1(4480,1615) 4480,1465 4825,1120 P803.3@4925,1120
SPI5_SCK: P803.1 U900.19 | length 1588.2
  Component Side w10: U900.19@4260.16,2253.31 4260.16,2225.38 4540,1945.54 4540,1540 v1(4560,1520)
  Solder Side w10: v1(4560,1520) 4875,1205 5040,1205 P803.1@5125,1120
SWCLK: CON900.9 U900.109 | length 940.2
  Component Side w10: U900.109@4688.31,1490.51 4744.49,1490.51 4775,1460 v1(4855,1460)
  Solder Side w10: v1(4855,1460) 4975,1580 5150,1580 5320,1750 5425,1750 CON900.9@5475,1800
SWDIO: CON900.7 U900.105 | length 1425.4
  Component Side w10: U900.105@4555.43,1416.69 4555.43,1460.43 4570,1475 4625,1475 4865,1235 5165,1235 5250,1320 5250,1600 5300,1650 5425,1650 CON900.7@5475,1700
SWO: CON900.13 U900.133 | length 822.7
  Component Side w10: U900.133@4688.31,1962.95 4757.95,1962.95 4770,1975 4910,1975 4935,1950 5425,1950 CON900.13@5475,2000
TD_N: CON400.3 IC400.16 R409.1 | length 1102
  Component Side w11: 2770.79,1804.21 IC400.16@2809.65,1804.21
  Component Side w13: CON400.3@1884.76,1749.84 1913.62,1720.98 2174.2,1720.98 2207.98,1687.2 2315,1687.2 2402.8,1775 R409.1@2545,1775 2575,1775 2663.9,1686.1 2680,1686.1 2680,1740 2744.21,1804.21 2768.27,1804.21
TD_P: CON400.2 IC400.17 R407.2 | length 1106.5
  Component Side w11: 2775,1784.53 IC400.17@2809.65,1784.53
  Component Side w13: CON400.2@1884.76,1669.92 1913.62,1698.78 2165,1698.78 2198.78,1665 2315,1665 2405,1575 R407.2@2545,1575 2575,1575 2663.9,1663.9 2689.2,1663.9 2702.2,1676.9 2702.2,1730.8 2755.92,1784.53 2775,1784.53
TX_EN: IC400.2 U900.70 | length 1025.8
  Component Side w10: IC400.2@3063.58,1920.35 3063.58,1958.58 v2(3090,1985) ; v1(3785,1545) 3800.12,1529.88 U900.70@3851.69,1529.88
  Solder Side w10: v2(3090,1985) 3285,1985 3725,1545 v1(3785,1545)
TXD0: IC400.3 U900.73 | length 1234
  Component Side w10: v2(3040,1990) 3043.9,1986.1 IC400.3@3043.9,1920.35 ; v1(3925,1485) 3925.51,1484.49 U900.73@3925.51,1416.69
  Solder Side w10: v2(3040,1990) 3080,1950 3295,1950 3760,1485 v1(3925,1485)
TXD1: IC400.4 U900.74 | length 1363.5
  Component Side w10: v2(2995,1985) 3024.21,1955.79 IC400.4@3024.21,1920.35 ; U900.74@3945.2,1416.69 3945.2,1374.8 v1(3960,1360)
  Solder Side w10: v2(2995,1985) 3055,1925 3295,1925 3860,1360 v1(3960,1360)
USART2_CK: P800.3 U900.123 | length 838.4
  Component Side w10: U900.123@4688.31,1766.1 4731.1,1766.1 4775,1810 5165,1810 5185,1790 5185,1595 P800.3@5100,1510
USART2_CTS: P800.1 U900.117 | length 566.3
  Component Side w10: U900.117@4688.31,1647.99 4727.01,1647.99 4770,1605 4825,1605 5015,1415 5015,1390 5095,1310 P800.1@5100,1310
USART2_RTS: P800.2 U900.118 | length 518.4
  Component Side w10: U900.118@4688.31,1667.68 4732.32,1667.68 4775,1625 4885,1625 P800.2@5100,1410
USART2_RX: P804.2 U900.122 | length 442.2
  Component Side w10: U900.122@4688.31,1746.42 4741.42,1746.42 4780,1785 5065,1785 P804.2@5100,1750
USART2_TX: P804.1 U900.119 | length 431.3
  Component Side w10: U900.119@4688.31,1687.36 4737.64,1687.36 4780,1645 5095,1645 P804.1@5100,1650
pads on no net: CON600.0 CON601.0 CON601.4 CON601.9 CON601.10 CON601.11 CON601.12 CON601.14 CON601.15 CON601.16 CON601.17 CON601.18 CON601.19 CON601.20 CON601.21 CON601.22 CON601.23 CON601.24 CON601.25 CON601.26 CON900.3 CON900.5 CON900.11 CON900.17 CON900.19 IC201.1 IC201.3 IC201.5 IC201.7 IC201.8 IC305.2 IC305.3 IC305.13 IC400.1 IC400.5 IC400.6 IC400.7 IC400.8 IC400.9 IC400.10 IC400.11 IC400.12 IC400.24 IC400.25 IC400.27 IC400.33 IC400.38 IC400.41 IC400.42 IC400.45 IC400.46 IC401.5 IC402.5 OSC901.2 OSC901.3 SD700.11 U900.2 U900.5 U900.7 U900.12 U900.13 U900.14 U900.15 U900.18 U900.22 U900.26 U900.37 U900.40 U900.46 U900.47 U900.48 U900.49 U900.50 U900.53 U900.54 U900.55 U900.67 U900.68 U900.69 U900.75 U900.76 U900.77 U900.78 U900.79 U900.80 U900.82 U900.85 U900.86 U900.88 U900.89 U900.90 U900.91 U900.92 U900.93 U900.97 U900.101 U900.102 U900.103 U900.104 U900.110 U900.114 U900.115 U900.124 U900.125 U900.126 U900.127 U900.128 U900.129 U900.132 U900.134 U900.137 U900.141 U900.142
copper on no net:
  other v4: 1219.1,2754.6 1219.1,4034.1 1219.1,4519.6 1219.1,5799.1
  other v6: 1275,1200 5425,2600 5425,5625
  other v7: 5542.09,3089.09 5542.09,4039.88

## Polygon pours and split planes (outlines as drawn)
5V_THERMAL on Solder Side "Solder Side-No Net" (solid, pour order 6): 3050,2175 3050,3300 2200,3300 2200,2175
GND on Solder Side "Solder Side-No Net" (solid, pour order 13): 3100,3550 3600,3550 3600,3825 3100,3825
GND on Ground "Solder Side-No Net" (solid, pour order 7): 1000,6000 5750,6000 5750,1000 1000,1000
12V on Power "Solder Side-No Net" (solid, pour order 8): 3339.04,2757.17 3530.3,2757.17 3576.54,2803.41 3576.57,2803.43 3576.59,2803.46 3666,2892.87 3666,3720 3671.57,3733.43 3671.59,3733.46 3966.54,4028.41 3966.57,4028.43 3980,4034 4617.13,4034 4921.54,4338.41 4921.56,4338.44 4921.59,4338.46 4936,4352.87 4936,4817.13 4892.13,4861 4827.87,4861 4794,4827.13 4794,4395 4788.44,4381.56 4788.41,4381.54 4543.46,4136.59 4543.44,4136.56 4530,4131 3507.87,4131 3499,4122.13 3499,2925 3493.43,2911.57 3493.41,2911.54 3488.46,2906.59 3488.41,2906.54
5V on Power "Solder Side-No Net" (solid, pour order 9): 3306.63,2778.5 3456,2927.87 3456,4125 3461,4137.85 3461,4432.13 3306.59,4586.54 3306.57,4586.56 3301,4600 3301,4770 3306.57,4783.44 3306.59,4783.46 3311.54,4788.41 3311.57,4788.44 3311.59,4788.46 3386.54,4863.41 3386.57,4863.44 3400,4869 3865,4869 3878.43,4863.44 3878.46,4863.41 3962.87,4779 4232.13,4779 4611,5157.87 4611,5981 1019,5981 1019,4014 2190,4014 2203.43,4008.43 2203.46,4008.41 2418.41,3793.46 2418.43,3793.43 2424,3780 2424,3735 2418.43,3721.57 2418.41,3721.54 2348.46,3651.59 2348.43,3651.57 2335,3646 2102.87,3646 2014,3557.13 2014,2567.87 2192.87,2389 2917.13,2389 3306.58,2778.45 3306.61,2778.48
3V3 on Power "Solder Side-No Net" (solid, pour order 10): 2938.46,2356.59 3306.61,2724.74 3320.04,2719.17 3538.17,2719.17 3551.61,2724.74 3551.63,2724.76 3603.41,2776.54 3603.43,2776.57 3603.46,2776.59 3698.41,2871.54 3698.43,2871.57 3704,2885 3704,3712.13 3987.87,3996 4625,3996 4638.44,4001.57 4638.46,4001.59 4948.41,4311.54 4948.44,4311.56 4948.46,4311.59 4968.41,4331.54 4968.44,4331.56 4974,4345 4974,4825 4968.44,4838.44 4968.41,4838.46 4913.46,4893.41 4913.44,4893.44 4900,4899 4820,4899 4806.56,4893.44 4806.54,4893.41 4761.59,4848.46 4761.56,4848.44 4756,4835 4756,4402.87 4522.13,4169 3500,4169 3499,4168.97 3499,4440 3493.43,4453.44 3493.41,4453.46 3339,4607.87 3339,4762.13 3407.87,4831 3857.13,4831 3941.54,4746.59 3941.57,4746.56 3955,4741 4240,4741 4253.44,4746.56 4253.46,4746.59 4643.41,5136.54 4643.44,5136.56 4649,5150 4649,6000 5750,6000 5750,1000 1000,1000 1000,3976 2182.13,3976 2386,3772.13 2386,3742.87 2327.13,3684 2095,3684 2081.57,3678.43 2081.54,3678.41 1981.59,3578.46 1981.57,3578.43 1976,3565 1976,2560 1981.57,2546.57 1981.59,2546.54 2171.54,2356.59 2171.57,2356.57 2185,2351 2925,2351 2938.43,2356.57

## Keep-outs
Keep-Out Layer:
  lines w30: 1000,1000 1000,6000 5750,6000 5750,1000 1000,1000 ; 1000,1000 1000,1000

## Other copper
Component Side:
  text "DAQ v0.1" at 5080,5050 h150
  text "Tim Yao" at 5080,4935 h150
  text "Jason Zhang" at 5085,4825 h150
  text "Resistance Racing" at 4810,4515 h150

## Silkscreen, mask and mechanical layers (free items; w line width, h text height)
Top Solder:
  text "DAQ v0.1" at 5080,5050 h150
  text "Tim Yao" at 5080,4935 h150
  text "Jason Zhang" at 5085,4825 h150
  text "Resistance Racing" at 4810,4515 h150
Bottom Solder:
  rectangle: 2200,2175 3050,3300
  rectangle: 3100,3550 3600,3825